# Altium PCB crispDemo.PcbDoc
Units mm, origin at the board's own origin, x right, y up, seen from the top; angles counter-clockwise.
Board outline 152.4 x 101.6 mm, 2 copper layers (Top Layer, Bottom Layer); 15 components, 0 nets, 552 pads, 9 vias.
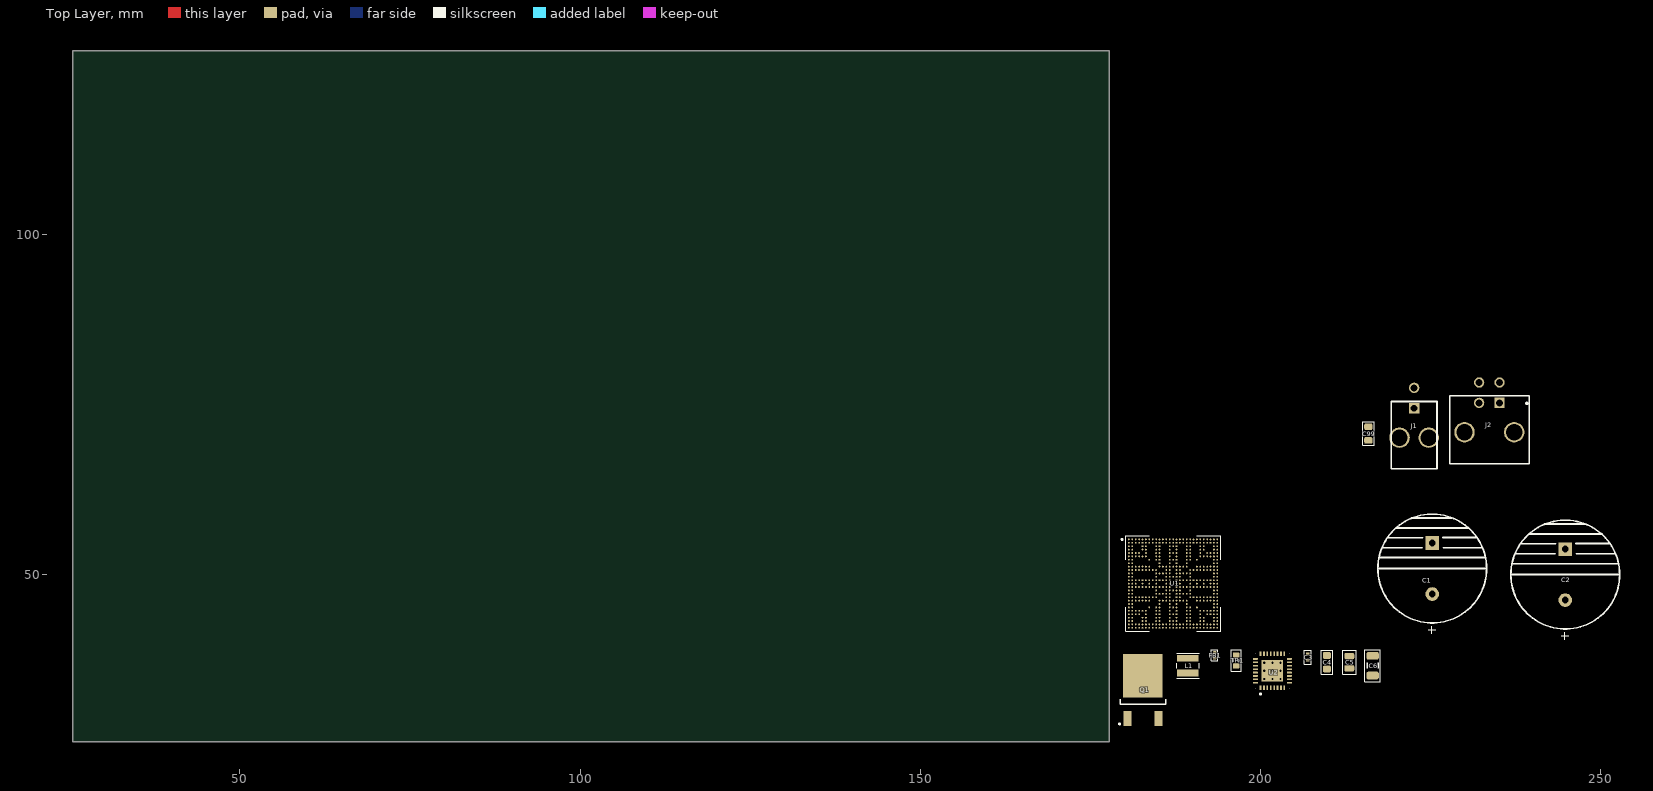
[diagram p0: Top Layer view]
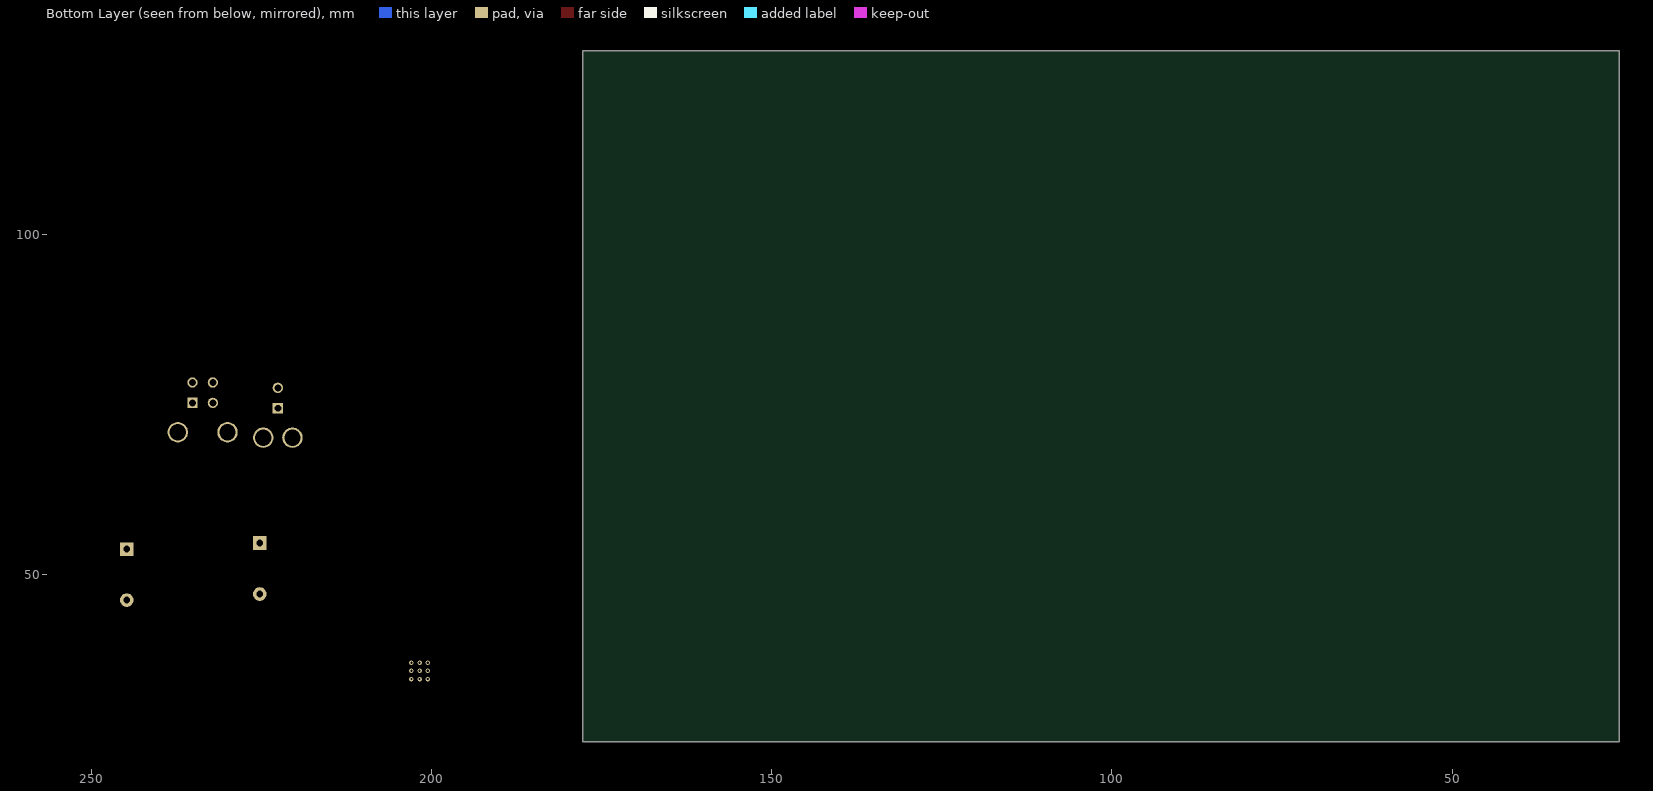
[diagram p1: Bottom Layer view, seen from below]

## Layer stack, top to bottom
Top Solder: solder mask 0.0102, Solder Resist, Dk 3.5
Top Layer: signal copper 0.0356
Dielectric 1: dielectric 0.32, FR-4, Dk 4.8
Bottom Layer: signal copper 0.0356
Bottom Solder: solder mask 0.0102, Solder Resist, Dk 3.5

## Board outline
25.4,25.4 177.8,25.4 177.8,127 25.4,127

## Design rules (kind name [scope] priority, off if disabled: settings)
Clearance [All] p1: gap=0.254 ignorepadtopadclearanceinfootprint=FALSE except(0: Arc-Hole Track-Hole SMDPad-Hole THPad-Hole Via-Hole Fill-Hole Poly-Hole Region-Hole Text-Hole)
PolygonConnect [All] p1: connectstyle=Relief reliefconductorwidth=0.254 reliefentries=4 polygonreliefangle="90 Angle" airgapwidth=0.254
RoomDefinition P01_crispDemo [InComponentClass('P01_crispDemo')] p1: confinementstyle=ConfineIn formatcopy=TRUE lockcomponents=FALSE outline 178.943,26.924 217.932,26.924 217.932,39.116 178.943,39.116
RoomDefinition P02_crispDemo [InComponentClass('P02_crispDemo')] p2: confinementstyle=ConfineIn formatcopy=TRUE lockcomponents=FALSE outline 178.943,26.924 214.249,26.924 214.249,94.234 178.943,94.234
RoutingVias [All] p1: holewidth=0.711 width=1.27 viastyle="Through Hole" minholewidth=0.711 minwidth=1.27 maxholewidth=0.711 maxwidth=1.27
SolderMaskExpansion [All] p1: expansion=0.102 istentingtop=FALSE
Width [All] p1: maxlimit=0.254 minlimit=0.254 preferedwidth=0.254
30 further rules are at their usual default settings.

## Classes and differential pairs
component class P02_crispDemo: U1
component class P01_crispDemo: C1 C2 C3 C4 C5 C6 C99 FB1 J1 J2 L1 Q1 TR1 U2

## Components (designator, comment, footprint, x,y, rotation, side; value= is the part's Value field where it differs from the comment)
C1 "SCH - PASSIVES - POLARISED CAPACITOR" "PCB - Capacitors - ELCO - Nichicon UKA1E472MHD" 225.298,47.11 r90 top
C2 "SCH - PASSIVES - POLARISED CAPACITOR" "PCB - Capacitors - ELCO - Nichicon UKA1E472MHD" 244.856,46.221 r90 top
C3 "SCH - PASSIVES - CAPACITOR" "PCB - CAPACITOR - MLCC - CAP 0402_1005" 207.01,37.846 r90 top
C4 "SCH - PASSIVES - CAPACITOR" "PCB - CAPACITOR - MLCC - CAP 0603_1608" 209.804,37.084 r90 top
C5 "SCH - PASSIVES - CAPACITOR" "PCB - CAPACITOR - MLCC - CAP 0805_2012" 213.106,37.084 r90 top
C6 "SCH - PASSIVES - CAPACITOR" "PCB - CAPACITOR - MLCC - CAP 1206_3216" 216.535,36.576 r90 top
C99 "SCH - PASSIVES - CAPACITOR" "PCB - CAPACITOR - MLCC - CAP 0603_1608" 215.9,70.706 r90 top
FB1 "SCH - PASSIVES - FERRITE BEAD CHIP" "PCB - Passiv - Ferrit Bead Chip - 0402" 193.294,38.1 r90 top
J1 "SCH - CONNECTORS - MOLEX 43045-0221" "PCB - CONNECTORS - MOLEX 43045-0221" 222.64,74.424 r0 top
J2 "SCH - CONNECTORS - TE 3-794677-4" "PCB - CONNECTORS - TE 3-794677-4" 233.689,74.56 r0 top
L1 "SCH - PASSIVES - INDUCTOR" "PCB - PASSIV - IND - WE-TPC 2828" 189.357,36.576 r90 top
Q1 "SCH - FET - P-CH - INFINEON PG-TO252-3-313" "PCB - Leaded - DPAK - Infineon PG-TO252-3" 182.753,33.02 r90 top
TR1 "SCH - SENSOR - TEMPARATUR - NTC 0603" "PCB- SENSOR - TEMPARATUR - NTC 0603" 196.469,37.338 r90 top
U1 "SCH - MCU - NXP MIMX8MM4CVTKZAA" "PCB - MCU - NXP FCBGA 14x14_0.5P" 187.198,48.641 r0 top
U2 "SCH - DAC - AKM AK4454" "PCB - DAC - AKM QFN32" 201.803,35.814 r90 top

## Footprints (in the part's own frame and the unit in brackets; to place one, negate y for a bottom-side part, rotate by r counter-clockwise, add the part's x,y. Pads: shape width x height; smd on the part's side, far side on the other; paste and mask are expansions set on the pad)
"PCB - CAPACITOR - MLCC - CAP 0402_1005" [mm]
  rrect50% 0.4x0.5 smd: 1(-0.475,0) 2(0.475,0)
  silkscreen extent -1.02,-0.5 1,0.5, body extent -0.5,-0.28 0.5,0.27, height 0.49
"PCB - CAPACITOR - MLCC - CAP 0603_1608" [mm]
  rrect50% 1x1.2 smd: 1(-1,0) 2(1,0)
  silkscreen extent -1.75,-0.85 1.75,0.85, body extent -0.87,-0.44 0.87,0.43, height 0.93
"PCB - CAPACITOR - MLCC - CAP 0805_2012" [mm]
  rrect50% 0.95x1.45 smd: 1(-0.9,0) 2(0.9,0)
  silkscreen extent -1.75,-1 1.75,1, body extent -1.1,-0.74 1.1,0.71, height 1.39
"PCB - CAPACITOR - MLCC - CAP 1206_3216" [mm]
  rrect50% 1.15x1.8 smd: 1(-1.45,0) 2(1.45,0)
  silkscreen extent -2.35,-1.15 2.35,1.15, body extent -1.6,-0.81 1.6,0.79, height 0.94
"PCB - Capacitors - ELCO - Nichicon UKA1E472MHD" [mm]
  round 2 hole 1: 1(0,0)
  rect 2x2 hole 1: 2(7.5,0)
  silkscreen extent -5.84,-8 11.75,8, body extent -4.17,-7.98 11.77,7.98, height 35.5
"PCB - CONNECTORS - MOLEX 43045-0221" [mm]
  rect 1.52x1.52 hole 1.02: 1(0,0)
  round 1.52 hole 1.02: 2(0,3)
  round 3 hole 2.41 unplated: ""(-2.15,-4.32) ""(2.15,-4.32)
  silkscreen extent -3.35,-8.9 3.35,1, body extent -3.64,-8.91 3.56,3.33, height 1.32
"PCB - CONNECTORS - TE 3-794677-4" [mm]
  rect 1.52x1.52 hole 1.02: 1(1.5,0.65)
  round 1.52 hole 1.02: 2(-1.5,0.65) 3(1.5,3.65) 4(-1.5,3.65)
  round 3 hole 2.4 unplated: MH1(-3.65,-3.66) MH2(3.65,-3.66)
  silkscreen extent -5.85,-8.32 5.85,1.72, body extent -5,-8.28 5,3.96, height 8.73
"PCB - DAC - AKM QFN32" [mm]
  rrect50% 0.7x0.25 smd: 1(-2.5,1.75) 2(-2.5,1.25) 3(-2.5,0.75) 4(-2.5,0.25) 5(-2.5,-0.25) 6(-2.5,-0.75) 7(-2.5,-1.25) 8(-2.5,-1.75) 17(2.5,-1.75) 18(2.5,-1.25) 19(2.5,-0.75) 20(2.5,-0.25) 21(2.5,0.25) 22(2.5,0.75) 23(2.5,1.25) 24(2.5,1.75)
  rrect50% 0.25x0.7 smd: 9(-1.75,-2.5) 10(-1.25,-2.5) 11(-0.75,-2.5) 12(-0.25,-2.5) 13(0.25,-2.5) 14(0.75,-2.5) 15(1.25,-2.5) 16(1.75,-2.5) 25(1.75,2.5) 26(1.25,2.5) 27(0.75,2.5) 28(0.25,2.5) 29(-0.25,2.5) 30(-0.75,2.5) 31(-1.25,2.5) 32(-1.75,2.5)
  rect 3.15x3.15 smd: PAD(0,0)
  silkscreen extent -3.5,-2.55 2.55,2.55, body extent -2.55,-2.55 2.55,2.55, height 0.9
"PCB - Leaded - DPAK - Infineon PG-TO252-3" [mm]
  rect 2.2x1.2 smd: 1(-4.23,2.28) 3(-4.23,-2.28)
  rect 6.4x5.8 smd: 2(2.07,0)
  silkscreen extent -5.1,-3.35 -1.35,3.52, body extent -4.9,-3.32 4.8,3.32, height 2.35
"PCB - MCU - NXP FCBGA 14x14_0.5P" [mil]
  round 10 smd: A1(-255.91,255.91) A2(-236.22,255.91) A3(-216.54,255.91) A4(-196.85,255.91) A5(-177.17,255.91) A6(-157.48,255.91) A7(-137.8,255.91) A8(-118.11,255.91) A9(-98.43,255.91) A10(-78.74,255.91) A11(-59.06,255.91) A12(-39.37,255.91) A13(-19.69,255.91) A14(0,255.91) A15(19.69,255.91) A16(39.37,255.91) A17(59.06,255.91) A18(78.74,255.91) A19(98.43,255.91) A20(118.11,255.91) A21(137.8,255.91) A22(157.48,255.91) A23(177.17,255.91) A24(196.85,255.91) A25(216.54,255.91) A26(236.22,255.91) A27(255.91,255.91) AA1(-255.91,-137.8) AA2(-236.22,-137.8) AA7(-137.8,-137.8) AA9(-98.43,-137.8) AA10(-78.74,-137.8) AA13(-19.69,-137.8) AA14(0,-137.8) AA15(19.69,-137.8) AA18(78.74,-137.8) AA19(98.43,-137.8) AA21(137.8,-137.8) AA26(236.22,-137.8) AA27(255.91,-137.8) AB1(-255.91,-157.48) AB2(-236.22,-157.48) AB3(-216.54,-157.48) AB4(-196.85,-157.48) AB5(-177.17,-157.48) AB6(-157.48,-157.48) AB9(-98.43,-157.48) AB10(-78.74,-157.48) AB13(-19.69,-157.48) AB15(19.69,-157.48) AB18(78.74,-157.48) AB19(98.43,-157.48) AB22(157.48,-157.48) AB23(177.17,-157.48) AB24(196.85,-157.48) AB25(216.54,-157.48) AB26(236.22,-157.48) AB27(255.91,-157.48) AC1(-255.91,-177.17) AC2(-236.22,-177.17) AC3(-216.54,-177.17) AC4(-196.85,-177.17) AC6(-157.48,-177.17) AC9(-98.43,-177.17) AC10(-78.74,-177.17) AC13(-19.69,-177.17) AC14(0,-177.17) AC15(19.69,-177.17) AC18(78.74,-177.17) AC19(98.43,-177.17) AC22(157.48,-177.17) AC24(196.85,-177.17) AC25(216.54,-177.17) AC26(236.22,-177.17) AC27(255.91,-177.17) AD1(-255.91,-196.85) AD2(-236.22,-196.85) AD5(-177.17,-196.85) AD6(-157.48,-196.85) AD9(-98.43,-196.85) AD10(-78.74,-196.85) AD13(-19.69,-196.85) AD15(19.69,-196.85) AD18(78.74,-196.85) AD19(98.43,-196.85) AD22(157.48,-196.85) AD23(177.17,-196.85) AD26(236.22,-196.85) AD27(255.91,-196.85) AE1(-255.91,-216.54) AE2(-236.22,-216.54) AE5(-177.17,-216.54) AE6(-157.48,-216.54) AE9(-98.43,-216.54) AE10(-78.74,-216.54) AE13(-19.69,-216.54) AE14(0,-216.54) AE15(19.69,-216.54) AE18(78.74,-216.54) AE19(98.43,-216.54) AE22(157.48,-216.54) AE23(177.17,-216.54) AE26(236.22,-216.54) AE27(255.91,-216.54) AF1(-255.91,-236.22) AF2(-236.22,-236.22) AF3(-216.54,-236.22) AF4(-196.85,-236.22) AF5(-177.17,-236.22) AF6(-157.48,-236.22) AF7(-137.8,-236.22) AF8(-118.11,-236.22) AF9(-98.43,-236.22) AF10(-78.74,-236.22) AF11(-59.06,-236.22) AF12(-39.37,-236.22) AF13(-19.69,-236.22) AF14(0,-236.22) AF15(19.69,-236.22) AF16(39.37,-236.22) AF17(59.06,-236.22) AF18(78.74,-236.22) AF19(98.43,-236.22) AF20(118.11,-236.22) AF21(137.8,-236.22) AF22(157.48,-236.22) AF23(177.17,-236.22) AF24(196.85,-236.22) AF25(216.54,-236.22) AF26(236.22,-236.22) AF27(255.91,-236.22) AG1(-255.91,-255.91) AG2(-236.22,-255.91) AG3(-216.54,-255.91) AG4(-196.85,-255.91) AG5(-177.17,-255.91) AG6(-157.48,-255.91) AG7(-137.8,-255.91) AG8(-118.11,-255.91) AG9(-98.43,-255.91) AG10(-78.74,-255.91) AG11(-59.06,-255.91) AG12(-39.37,-255.91) AG13(-19.69,-255.91) AG14(0,-255.91) AG15(19.69,-255.91) AG16(39.37,-255.91) AG17(59.06,-255.91) AG18(78.74,-255.91) AG19(98.43,-255.91) AG20(118.11,-255.91) AG21(137.8,-255.91) AG22(157.48,-255.91) AG23(177.17,-255.91) AG24(196.85,-255.91) AG25(216.54,-255.91) AG26(236.22,-255.91) AG27(255.91,-255.91) B1(-255.91,236.22) B2(-236.22,236.22) B3(-216.54,236.22) B4(-196.85,236.22) B5(-177.17,236.22) B6(-157.48,236.22) B7(-137.8,236.22) B8(-118.11,236.22) B9(-98.43,236.22) B10(-78.74,236.22) B11(-59.06,236.22) B12(-39.37,236.22) B13(-19.69,236.22) B14(0,236.22) B15(19.69,236.22) B16(39.37,236.22) B17(59.06,236.22) B18(78.74,236.22) B19(98.43,236.22) B20(118.11,236.22) B21(137.8,236.22) B22(157.48,236.22) B23(177.17,236.22) B24(196.85,236.22) B25(216.54,236.22) B26(236.22,236.22) B27(255.91,236.22) C1(-255.91,216.54) C2(-236.22,216.54) C5(-177.17,216.54) C6(-157.48,216.54) C9(-98.43,216.54) C10(-78.74,216.54) C13(-19.69,216.54) C14(0,216.54) C15(19.69,216.54) C18(78.74,216.54) C19(98.43,216.54) C22(157.48,216.54) C23(177.17,216.54) C26(236.22,216.54) C27(255.91,216.54) D1(-255.91,196.85) D2(-236.22,196.85) D5(-177.17,196.85) D6(-157.48,196.85) D9(-98.43,196.85) D10(-78.74,196.85) D13(-19.69,196.85) D15(19.69,196.85) D18(78.74,196.85) D19(98.43,196.85) D22(157.48,196.85) D23(177.17,196.85) D26(236.22,196.85) D27(255.91,196.85) E1(-255.91,177.17) E2(-236.22,177.17) E3(-216.54,177.17) E4(-196.85,177.17) E6(-157.48,177.17) E9(-98.43,177.17) E10(-78.74,177.17) E13(-19.69,177.17) E14(0,177.17) E15(19.69,177.17) E18(78.74,177.17) E19(98.43,177.17) E22(157.48,177.17) E24(196.85,177.17) E25(216.54,177.17) E26(236.22,177.17) E27(255.91,177.17) F1(-255.91,157.48) F2(-236.22,157.48) F3(-216.54,157.48) F4(-196.85,157.48) F5(-177.17,157.48) F6(-157.48,157.48) F9(-98.43,157.48) F10(-78.74,157.48) F13(-19.69,157.48) F15(19.69,157.48) F18(78.74,157.48) F19(98.43,157.48) F22(157.48,157.48) F23(177.17,157.48) F24(196.85,157.48) F25(216.54,157.48) F26(236.22,157.48) F27(255.91,157.48) G1(-255.91,137.8) G2(-236.22,137.8) G7(-137.8,137.8) G9(-98.43,137.8) G10(-78.74,137.8) G13(-19.69,137.8) G14(0,137.8) G15(19.69,137.8) G18(78.74,137.8) G19(98.43,137.8) G21(137.8,137.8) G26(236.22,137.8) G27(255.91,137.8) H1(-255.91,118.11) H2(-236.22,118.11) H10(-78.74,118.11) H13(-19.69,118.11) H15(19.69,118.11) H18(78.74,118.11) H26(236.22,118.11) H27(255.91,118.11) J1(-255.91,98.43) J2(-236.22,98.43) J3(-216.54,98.43) J4(-196.85,98.43) J5(-177.17,98.43) J6(-157.48,98.43) J7(-137.8,98.43) J10(-78.74,98.43) J11(-59.06,98.43) J12(-39.37,98.43) J13(-19.69,98.43) J14(0,98.43) J15(19.69,98.43) J16(39.37,98.43) J17(59.06,98.43) J18(78.74,98.43) J21(137.8,98.43) J22(157.48,98.43) J23(177.17,98.43) J24(196.85,98.43) J25(216.54,98.43) J26(236.22,98.43) J27(255.91,98.43) K1(-255.91,78.74) K2(-236.22,78.74) K3(-216.54,78.74) K4(-196.85,78.74) K5(-177.17,78.74) K6(-157.48,78.74) K7(-137.8,78.74) K8(-118.11,78.74) K9(-98.43,78.74) K12(-39.37,78.74) K13(-19.69,78.74) K15(19.69,78.74) K16(39.37,78.74) K19(98.43,78.74) K20(118.11,78.74) K21(137.8,78.74) K22(157.48,78.74) K23(177.17,78.74) K24(196.85,78.74) K25(216.54,78.74) K26(236.22,78.74) K27(255.91,78.74) L1(-255.91,59.06) L2(-236.22,59.06) L9(-98.43,59.06) L10(-78.74,59.06) L11(-59.06,59.06) L12(-39.37,59.06) L13(-19.69,59.06) L15(19.69,59.06) L16(39.37,59.06) L17(59.06,59.06) L18(78.74,59.06) L19(98.43,59.06) L26(236.22,59.06) L27(255.91,59.06) M1(-255.91,39.37) M2(-236.22,39.37) M9(-98.43,39.37) M12(-39.37,39.37) M13(-19.69,39.37) M14(0,39.37) M15(19.69,39.37) M16(39.37,39.37) M19(98.43,39.37) M26(236.22,39.37) M27(255.91,39.37) N1(-255.91,19.68) N2(-236.22,19.68) N3(-216.54,19.68) N4(-196.85,19.68) N5(-177.17,19.68) N6(-157.48,19.68) N7(-137.8,19.68) N8(-118.11,19.68) N9(-98.43,19.68) N10(-78.74,19.68) N11(-59.06,19.68) N12(-39.37,19.68) N13(-19.69,19.68) N15(19.69,19.68) N16(39.37,19.68) N17(59.06,19.68) N18(78.74,19.68) N19(98.43,19.68) N20(118.11,19.68) N21(137.8,19.68) N22(157.48,19.68) N23(177.17,19.68) N24(196.85,19.68) N25(216.54,19.68) N26(236.22,19.68) N27(255.91,19.68) P1(-255.91,0) P2(-236.22,0) P3(-216.54,0) P5(-177.17,0) P7(-137.8,0) P9(-98.43,0) P12(-39.37,0) P13(-19.69,0) P15(19.69,0) P16(39.37,0) P19(98.43,0) P21(137.8,0) P23(177.17,0) P25(216.54,0) P26(236.22,0) P27(255.91,0) R1(-255.91,-19.68) R2(-236.22,-19.68) R3(-216.54,-19.68) R4(-196.85,-19.68) R5(-177.17,-19.68) R6(-157.48,-19.68) R7(-137.8,-19.68) R8(-118.11,-19.68) R9(-98.43,-19.68) R10(-78.74,-19.68) R11(-59.06,-19.68) R12(-39.37,-19.68) R13(-19.69,-19.68) R15(19.69,-19.68) R16(39.37,-19.68) R17(59.06,-19.68) R18(78.74,-19.68) R19(98.43,-19.68) R20(118.11,-19.68) R21(137.8,-19.68) R22(157.48,-19.68) R23(177.17,-19.68) R24(196.85,-19.68) R25(216.54,-19.68) R26(236.22,-19.68) R27(255.91,-19.68) T1(-255.91,-39.37) T2(-236.22,-39.37) T9(-98.43,-39.37) T12(-39.37,-39.37) T13(-19.69,-39.37) T14(0,-39.37) T15(19.69,-39.37) T16(39.37,-39.37) T19(98.43,-39.37) T26(236.22,-39.37) T27(255.91,-39.37) U1(-255.91,-59.06) U2(-236.22,-59.06) U9(-98.43,-59.06) U10(-78.74,-59.06) U11(-59.06,-59.06) U12(-39.37,-59.06) U13(-19.69,-59.06) U15(19.69,-59.06) U16(39.37,-59.06) U17(59.06,-59.06) U18(78.74,-59.06) U19(98.43,-59.06) U26(236.22,-59.06) U27(255.91,-59.06) V1(-255.91,-78.74) V2(-236.22,-78.74) V3(-216.54,-78.74) V4(-196.85,-78.74) V5(-177.17,-78.74) V6(-157.48,-78.74) V7(-137.8,-78.74) V8(-118.11,-78.74) V9(-98.43,-78.74) V12(-39.37,-78.74) V13(-19.69,-78.74) V15(19.69,-78.74) V16(39.37,-78.74) V19(98.43,-78.74) V20(118.11,-78.74) V21(137.8,-78.74) V22(157.48,-78.74) V23(177.17,-78.74) V24(196.85,-78.74) V25(216.54,-78.74) V26(236.22,-78.74) V27(255.91,-78.74) W1(-255.91,-98.43) W2(-236.22,-98.43) W3(-216.54,-98.43) W4(-196.85,-98.43) W5(-177.17,-98.43) W6(-157.48,-98.43) W7(-137.8,-98.43) W10(-78.74,-98.43) W11(-59.06,-98.43) W12(-39.37,-98.43) W13(-19.69,-98.43) W14(0,-98.43) W15(19.69,-98.43) W16(39.37,-98.43) W17(59.06,-98.43) W18(78.74,-98.43) W21(137.8,-98.43) W22(157.48,-98.43) W23(177.17,-98.43) W24(196.85,-98.43) W25(216.54,-98.43) W26(236.22,-98.43) W27(255.91,-98.43) Y1(-255.91,-118.11) Y2(-236.22,-118.11) Y10(-78.74,-118.11) Y13(-19.69,-118.11) Y15(19.69,-118.11) Y18(78.74,-118.11) Y26(236.22,-118.11) Y27(255.91,-118.11)
  silkscreen extent -299,-276 276,276, body extent -276,-276 276,276, height 49
"PCB - Passiv - Ferrit Bead Chip - 0402" [mm]
  rrect50% 0.4x0.5 smd: 1(-0.4,0) 2(0.4,0)
  silkscreen extent -0.83,-0.45 0.83,0.48, body extent -0.5,-0.25 0.5,0.25, height 0.3
"PCB - PASSIV - IND - WE-TPC 2828" [mm]
  rect 1x3.2 smd: 1(-1.1,0) 2(1.1,0)
  silkscreen extent -1.85,-1.65 1.85,1.65, body extent -1.4,-1.4 1.4,1.4, height 2.8
"PCB- SENSOR - TEMPARATUR - NTC 0603" [mm]
  rrect50% 0.8x1 smd: 1(-0.8,0) 2(0.8,0)
  silkscreen extent -1.55,-0.75 1.55,0.75, body extent -0.77,-0.39 0.83,0.41, height 0.4

## Part data
C1: library part EKYA630ELL152MLP1S, "1500 µF 63 V Aluminum Electrolytic Capacitors Radial, Can 10000 Hrs @ 105°C", Capacitance Tolerance="+-20% at 120Hz, 20°c", Lifetime @ Temperature="10000 Hrs @ 105°C", Manufacturer=Chemi-Con, Operating Temperature="-40°C ~ 105°C", Package="Radial, Can", Rated Capacitance=1500uF, Rated Voltage=63V, Ratings=NA, Ripple Current @ High Frequency="2.9 A @ 100 kHz", Ripple Current @ Low Frequency="1.74 A @ 120 Hz", Height - Seated (Max)=36.50mm, Lead Spacing=7.50mm, Mounting Type="Through Hole", Part Number=EKYA630ELL152MLP1S, Part Status=Active, Size / Dimension="Dia 16.00mm", Verified=No
C2: library part UKA1E472MHD, "CAP ALUM 4700UF 20% 25V RADIAL", Capacitance Tolerance="+-20% at 120Hz, 20°c", Lifetime @ Temperature="2000 Hrs @ 105°C", Manufacturer=Nichicon, Operating Temperature="-55°C ~ 105°C", Package="Radial, Can", Rated Capacitance=4700uF, Rated Voltage=25V, Ratings="AEC-Q200 compliant", Ripple Current @ High Frequency="1.9665 A @ 10 kHz", Ripple Current @ Low Frequency="1.71 A @ 120 Hz", Height - Seated (Max)=33.00mm, Lead Spacing=7.50mm, Mounting Type="Through Hole", Part Number=UKA1E472MHD, Part Status="Not For New Designs", Size / Dimension="Dia 16.00mm", Verified=No
C3: library part CL05B104KA5NNNC, "CAP CER 0.1UF 25V X7R 0402", Capacitance=0.1uF, Manufacturer="Samsung Electro-Mechanics", Operating Temperature="-55°C ~ 125°C", Package="0402 (1005 Metric)", Ratings=NA, Temperature Coefficient=X7R, Tolerance=+-10%, Voltage - Rated=25V, Features=NA, Part Number=CL05B104KA5NNNC, Part Status=Active, Size / Dimension="0.039\" L x 0.020\" W (1.00mm x 0.50mm)", Thickness (Max)="0.022\" (0.55mm)", Verified=No
C4 C99: library part CGA3E2X7R1H104K080AE, "CAP CER 0.1UF 50V X7R 0603", Capacitance=0.1uF, Manufacturer="TDK Corporation", Operating Temperature="-55°C ~ 125°C", Package="0603 (1608 Metric)", Ratings=AEC-Q200, Temperature Coefficient=X7R, Tolerance=+-10%, Voltage - Rated=50V, Features="Soft Termination", Part Number=CGA3E2X7R1H104K080AE, Part Status=Active, Size / Dimension="0.063\" L x 0.031\" W (1.60mm x 0.80mm)", Thickness (Max)="0.037\" (0.95mm)", Verified=No
C5: library part GCJ21BR71H105KA01L, "CAP CER 1UF 50V X7R 0805", Capacitance=1uF, Manufacturer="Murata Electronics", Operating Temperature="-55°C ~ 125°C", Package="0805 (2012 Metric)", Ratings=AEC-Q200, Temperature Coefficient=X7R, Tolerance=+-10%, Voltage - Rated=50V, Features="Soft Termination", Part Number=GCJ21BR71H105KA01L, Part Status=Active, Size / Dimension="0.079\" L x 0.049\" W (2.00mm x 1.25mm)", Thickness (Max)="0.057\" (1.45mm)", Verified=No
C6: library part GCJ31CR71H225KA12K, "CAP CER 2.2UF 50V X7R 1206", Capacitance="2.2 µF", Manufacturer="Murata Electronics", Operating Temperature="-55°C ~ 125°C", Package="1206 (3216 Metric)", Ratings=AEC-Q200, Temperature Coefficient=X7R, Tolerance=+-10%, Voltage - Rated=50V, Features="Soft Termination", Part Number=GCJ31CR71H225KA12K, Part Status=Active, Size / Dimension="0.126\" L x 0.063\" W (3.20mm x 1.60mm)", Thickness (Max)="0.075\" (1.90mm)", Verified=No
FB1: library part BLM15AG221SH1D, "FERRITE BEAD 220 OHM 0402 1LN", Current Rating (Max)=300mA, DC Resistance (DCR) (Max)=350mOhm, Impedance @ Frequency="220 Ohms @ 100 MHz", Manufacturer="Murata Electronics", Operating Temperature="-55°C ~ 125°C", Package="0402 (1005 Metric)", Ratings=AEC-Q200, Height (Max)="0.022\" (0.55mm)", Mounting Type="Surface Mount", Part Number=BLM15AG221SH1D, Part Status=Active, Series="EMIFIL®, BLM15", Size / Dimension="0.039\" L x 0.022\" W (1.00mm x 0.55mm)", Verified=No
J1: library part 0430450221, "CONN HEADER R/A 2POS", Current Rating (Amps)=8A, Insulation Color=Black, Manufacturer=Molex, Voltage Rating=600V, Connector Type=Header, Contact Type="Male Pin", Fastening Type="Locking Ramp", Mounting Type="Through Hole, Right Angle", Number of Positions=2, Number of Rows=2, Part Number=0430450221, Part Status=Active, Row Spacing - Mating="0.118\" (3.00mm)", Series="Micro-Fit 3.0 43045", Style="Board to Cable/Wire", Termination=Solder, Verified=No
J2: library part 3-794677-4, "CONN HEADER R/A 4POS 3MM", Current Rating (Amps)="Varies by Wire Gauge", Insulation Color=Black, Manufacturer="TE Connectivity AMP Connectors", Voltage Rating=250V, Connector Type=Header, Contact Type="Male Pin", Fastening Type="Locking Ramp", Mounting Type="Through Hole, Right Angle", Number of Positions=4, Number of Rows=2, Part Number=3-794677-4, Part Status=Active, Row Spacing - Mating="0.118\" (3.00mm)", Series="Micro MATE-N-LOK", Style="Board to Cable/Wire", Termination=Solder, Verified=No
L1: library part 744025002, "FIXED IND 2.2UH 1.8A 66 MOHM SMD", Current - Saturation (Isat)=2.4A, Current Rating (Amps)="1.8 A", DC Resistance (DCR)="66mOhm Max", Inductance="2.2 µH", Manufacturer="Würth Elektronik", Operating Temperature="-40°C ~ 125°C", Package=Nonstandard, Ratings=NA, Tolerance=±20%, Height - Seated (Max)="0.118\" (3.00mm)", Mounting Type="Surface Mount", Part Number=744025002, Part Status=Active, Series=WE-TPC, Shielding=Shielded, Size / Dimension="0.110\" L x 0.110\" W (2.80mm x 2.80mm)", Type="Drum Core, Wirewound", Verified=No
Q1: library part IPD50P04P413ATMA2, "MOSFET P-CH 40V 50A TO252-3", Current - Continuous Drain (Id) @ 25°C="50A (Tc)", Drain to Source Voltage (Vdss)="40 V", Drive Voltage (Max Rds On, Min Rds On)=10V, Manufacturer="Infineon Technologies", Operating Temperature="-55°C ~ 175°C (TJ)", Package="TO-252-3, DPak (2 Leads + Tab), SC-63", Power Dissipation (Max)="58W (Tc)", Ratings="AEC qualified", FET Type=P-Channel, Gate Charge (Qg) (Max) @ Vgs="51 nC @ 10 V", Mounting Type="Surface Mount", Part Number=IPD50P04P413ATMA2, Part Status=Active, Rds On (Max) @ Id, Vgs="12.6mOhm @ 50A, 10V", Series=OptiMOS®-P2, Technology="MOSFET (Metal Oxide)", Verified=No, Vgs (Max)=±20V, Vgs(th) (Max) @ Id="4V @ 85µA"
TR1: library part NTCS0603E3103JMT, "THERMISTOR NTC 10KOHM 3610K 0603", Manufacturer="Vishay Beyschlag/Draloric/BC Components", Operating Temperature="-40°C ~ 150°C", Package="0603 (1608 Metric)", Power - Max="125 mW", Ratings=AEC-Q200, Resistance in Ohms @ 25°C=10k, Resistance Tolerance=±5%, Mounting Type="Surface Mount", Part Number=NTCS0603E3103JMT, Part Status=Active, Verified=No
U1: library part MIMX8MM4CVTKZAA, "IC MPU I.MX8MM 1.6GHZ 486LFBGA", Manufacturer="NXP USA Inc.", Operating Temperature="-40°C ~ 105°C (TJ)", Package="486-LFBGA, FCBGA", Ratings=Industrial, Co-Processors/DSP="ARM® Cortex®-M4", Core Processor="ARM® Cortex®-A53", Number of Cores/Bus Width="2 Core, 64-Bit", Part Number=MIMX8MM4CVTKZAA, Part Status=Active, Series=i.MX8MM, Speed=1.6GHz, Verified=No
U2: library part AK4454VN, "IC DAC/AUDIO 32BIT 768K 32QFN", Manufacturer="Asahi Kasei Microdevices/AKM", Operating Temperature="-40°C ~ 105°C", Package="32-WFQFN Exposed Pad", Ratings=NA, Voltage - Supply="1.7V ~ 5.5V", Part Number=AK4454VN, Part Status=Active, Type="DAC, Audio", Verified=No

## Via types
v1: diameter 0.66/0.66 (per signal layer), hole 0.33, Top Layer to Bottom Layer, 9 vias

## Nets (pads, with @x,y where several pads share a name; then routed paths per layer and width w, separated by ;. In a path a pad name is that pad's centre, name@x,y a point inside that pad or via, vN(x,y) a via of type N, cw(c..) or ccw(c..) an arc to the next point about the centre after c; other vN are vias at no path point)
pads on no net: C1.1 C1.2 C2.1 C2.2 C3.1 C3.2 C4.1 C4.2 C5.1 C5.2 C6.1 C6.2 C99.1 C99.2 FB1.1 FB1.2 J1. J1.1 J1.2 J2.1 J2.2 J2.3 J2.4 J2.MH1 J2.MH2 L1.1 L1.2 Q1.1 Q1.2 Q1.3 TR1.1 TR1.2 U1.A1 U1.A2 U1.A3 U1.A4 U1.A5 U1.A6 U1.A7 U1.A8 U1.A9 U1.A10 U1.A11 U1.A12 U1.A13 U1.A14 U1.A15 U1.A16 U1.A17 U1.A18 U1.A19 U1.A20 U1.A21 U1.A22 U1.A23 U1.A24 U1.A25 U1.A26 U1.A27 U1.AA1 U1.AA2 U1.AA7 U1.AA9 U1.AA10 U1.AA13 U1.AA14 U1.AA15 U1.AA18 U1.AA19 U1.AA21 U1.AA26 U1.AA27 U1.AB1 U1.AB2 U1.AB3 U1.AB4 U1.AB5 U1.AB6 U1.AB9 U1.AB10 U1.AB13 U1.AB15 U1.AB18 U1.AB19 U1.AB22 U1.AB23 U1.AB24 U1.AB25 U1.AB26 U1.AB27 U1.AC1 U1.AC2 U1.AC3 U1.AC4 U1.AC6 U1.AC9 U1.AC10 U1.AC13 U1.AC14 U1.AC15 U1.AC18 U1.AC19 U1.AC22 U1.AC24 U1.AC25 U1.AC26 U1.AC27 U1.AD1 U1.AD2 U1.AD5 U1.AD6 U1.AD9 U1.AD10 U1.AD13 U1.AD15 U1.AD18 U1.AD19 U1.AD22 U1.AD23 U1.AD26 U1.AD27 U1.AE1 U1.AE2 U1.AE5 U1.AE6 U1.AE9 U1.AE10 U1.AE13 U1.AE14 U1.AE15 U1.AE18 U1.AE19 U1.AE22 U1.AE23 U1.AE26 U1.AE27 U1.AF1 U1.AF2 U1.AF3 U1.AF4 U1.AF5 U1.AF6 U1.AF7 U1.AF8 U1.AF9 U1.AF10 U1.AF11 U1.AF12 U1.AF13 U1.AF14 U1.AF15 U1.AF16 U1.AF17 U1.AF18 U1.AF19 U1.AF20 U1.AF21 U1.AF22 U1.AF23 U1.AF24 U1.AF25 U1.AF26 U1.AF27 U1.AG1 U1.AG2 U1.AG3 U1.AG4 U1.AG5 U1.AG6 U1.AG7 U1.AG8 U1.AG9 U1.AG10 U1.AG11 U1.AG12 U1.AG13 U1.AG14 U1.AG15 U1.AG16 U1.AG17 U1.AG18 U1.AG19 U1.AG20 U1.AG21 U1.AG22 U1.AG23 U1.AG24 U1.AG25 U1.AG26 U1.AG27 U1.B1 U1.B2 U1.B3 U1.B4 U1.B5 U1.B6 U1.B7 U1.B8 U1.B9 U1.B10 U1.B11 U1.B12 U1.B13 U1.B14 U1.B15 U1.B16 U1.B17 U1.B18 U1.B19 U1.B20 U1.B21 U1.B22 U1.B23 U1.B24 U1.B25 U1.B26 U1.B27 U1.C1 U1.C2 U1.C5 U1.C6 U1.C9 U1.C10 U1.C13 U1.C14 U1.C15 U1.C18 U1.C19 U1.C22 U1.C23 U1.C26 U1.C27 U1.D1 U1.D2 U1.D5 U1.D6 U1.D9 U1.D10 U1.D13 U1.D15 U1.D18 U1.D19 U1.D22 U1.D23 U1.D26 U1.D27 U1.E1 U1.E2 U1.E3 U1.E4 U1.E6 U1.E9 U1.E10 U1.E13 U1.E14 U1.E15 U1.E18 U1.E19 U1.E22 U1.E24 U1.E25 U1.E26 U1.E27 U1.F1 U1.F2 U1.F3 U1.F4 U1.F5 U1.F6 U1.F9 U1.F10 U1.F13 U1.F15 U1.F18 U1.F19 U1.F22 U1.F23 U1.F24 U1.F25 U1.F26 U1.F27 U1.G1 U1.G2 U1.G7 U1.G9 U1.G10 U1.G13 U1.G14 U1.G15 U1.G18 U1.G19 U1.G21 U1.G26 U1.G27 U1.H1 U1.H2 U1.H10 U1.H13 U1.H15 U1.H18 U1.H26 U1.H27 U1.J1 U1.J2 U1.J3 U1.J4 U1.J5 U1.J6 U1.J7 U1.J10 U1.J11 U1.J12 U1.J13 U1.J14 U1.J15 U1.J16 U1.J17 U1.J18 U1.J21 U1.J22 U1.J23 U1.J24 U1.J25 U1.J26 U1.J27 U1.K1 U1.K2 U1.K3 U1.K4 U1.K5 U1.K6 U1.K7 U1.K8 U1.K9 U1.K12 U1.K13 U1.K15 U1.K16 U1.K19 U1.K20 U1.K21 U1.K22 U1.K23 U1.K24 U1.K25 U1.K26 U1.K27 U1.L1 U1.L2 U1.L9 U1.L10 U1.L11 U1.L12 U1.L13 U1.L15 U1.L16 U1.L17 U1.L18 U1.L19 U1.L26 U1.L27 U1.M1 U1.M2 U1.M9 U1.M12 U1.M13 U1.M14 U1.M15 U1.M16 U1.M19 U1.M26 U1.M27 U1.N1 U1.N2 U1.N3 U1.N4 U1.N5 U1.N6 U1.N7 U1.N8 U1.N9 U1.N10 U1.N11 U1.N12 U1.N13 U1.N15 U1.N16 U1.N17 U1.N18 U1.N19 U1.N20 U1.N21 U1.N22 U1.N23 U1.N24 U1.N25 U1.N26 U1.N27 U1.P1 U1.P2 U1.P3 U1.P5 U1.P7 U1.P9 U1.P12 U1.P13 U1.P15 U1.P16 U1.P19 U1.P21 U1.P23 U1.P25 U1.P26 U1.P27 U1.R1 U1.R2 U1.R3 U1.R4 U1.R5 U1.R6 U1.R7 U1.R8 U1.R9 U1.R10 U1.R11 U1.R12 U1.R13 U1.R15 U1.R16 U1.R17 U1.R18 U1.R19 U1.R20 U1.R21 U1.R22 U1.R23 U1.R24 U1.R25 U1.R26 U1.R27 U1.T1 U1.T2 U1.T9 U1.T12 U1.T13 U1.T14 U1.T15 U1.T16 U1.T19 U1.T26 U1.T27 U1.U1 U1.U2 U1.U9 U1.U10 U1.U11 U1.U12 U1.U13 U1.U15 U1.U16 U1.U17 U1.U18 U1.U19 U1.U26 U1.U27 U1.V1 U1.V2 U1.V3 U1.V4 U1.V5 U1.V6 U1.V7 U1.V8 U1.V9 U1.V12 U1.V13 U1.V15 U1.V16 U1.V19 U1.V20 U1.V21 U1.V22 U1.V23 U1.V24 U1.V25 U1.V26 U1.V27 U1.W1 U1.W2 U1.W3 U1.W4 U1.W5 U1.W6 U1.W7 U1.W10 U1.W11 U1.W12 U1.W13 U1.W14 U1.W15 U1.W16 U1.W17 U1.W18 U1.W21 U1.W22 U1.W23 U1.W24 U1.W25 U1.W26 U1.W27 U1.Y1 U1.Y2 U1.Y10 U1.Y13 U1.Y15 U1.Y18 U1.Y26 U1.Y27 U2.1 U2.2 U2.3 U2.4 U2.5 U2.6 U2.7 U2.8 U2.9 U2.10 U2.11 U2.12 U2.13 U2.14 U2.15 U2.16 U2.17 U2.18 U2.19 U2.20 U2.21 U2.22 U2.23 U2.24 U2.25 U2.26 U2.27 U2.28 U2.29 U2.30 U2.31 U2.32 U2.PAD
copper on no net:
  other v1: 200.603,34.614 201.803,34.614 203.003,34.614 200.603,35.814 201.803,35.814 203.003,35.814 200.603,37.014 201.803,37.014 203.003,37.014